# Altium PCB PowerTestManual.PcbDoc
Units mm, origin at the board's own origin, x right, y up, seen from the top; angles counter-clockwise.
Board outline 40 x 28 mm, 2 copper layers (Top Layer, Bottom Layer); 24 components, 17 nets, 54 pads, 0 vias.
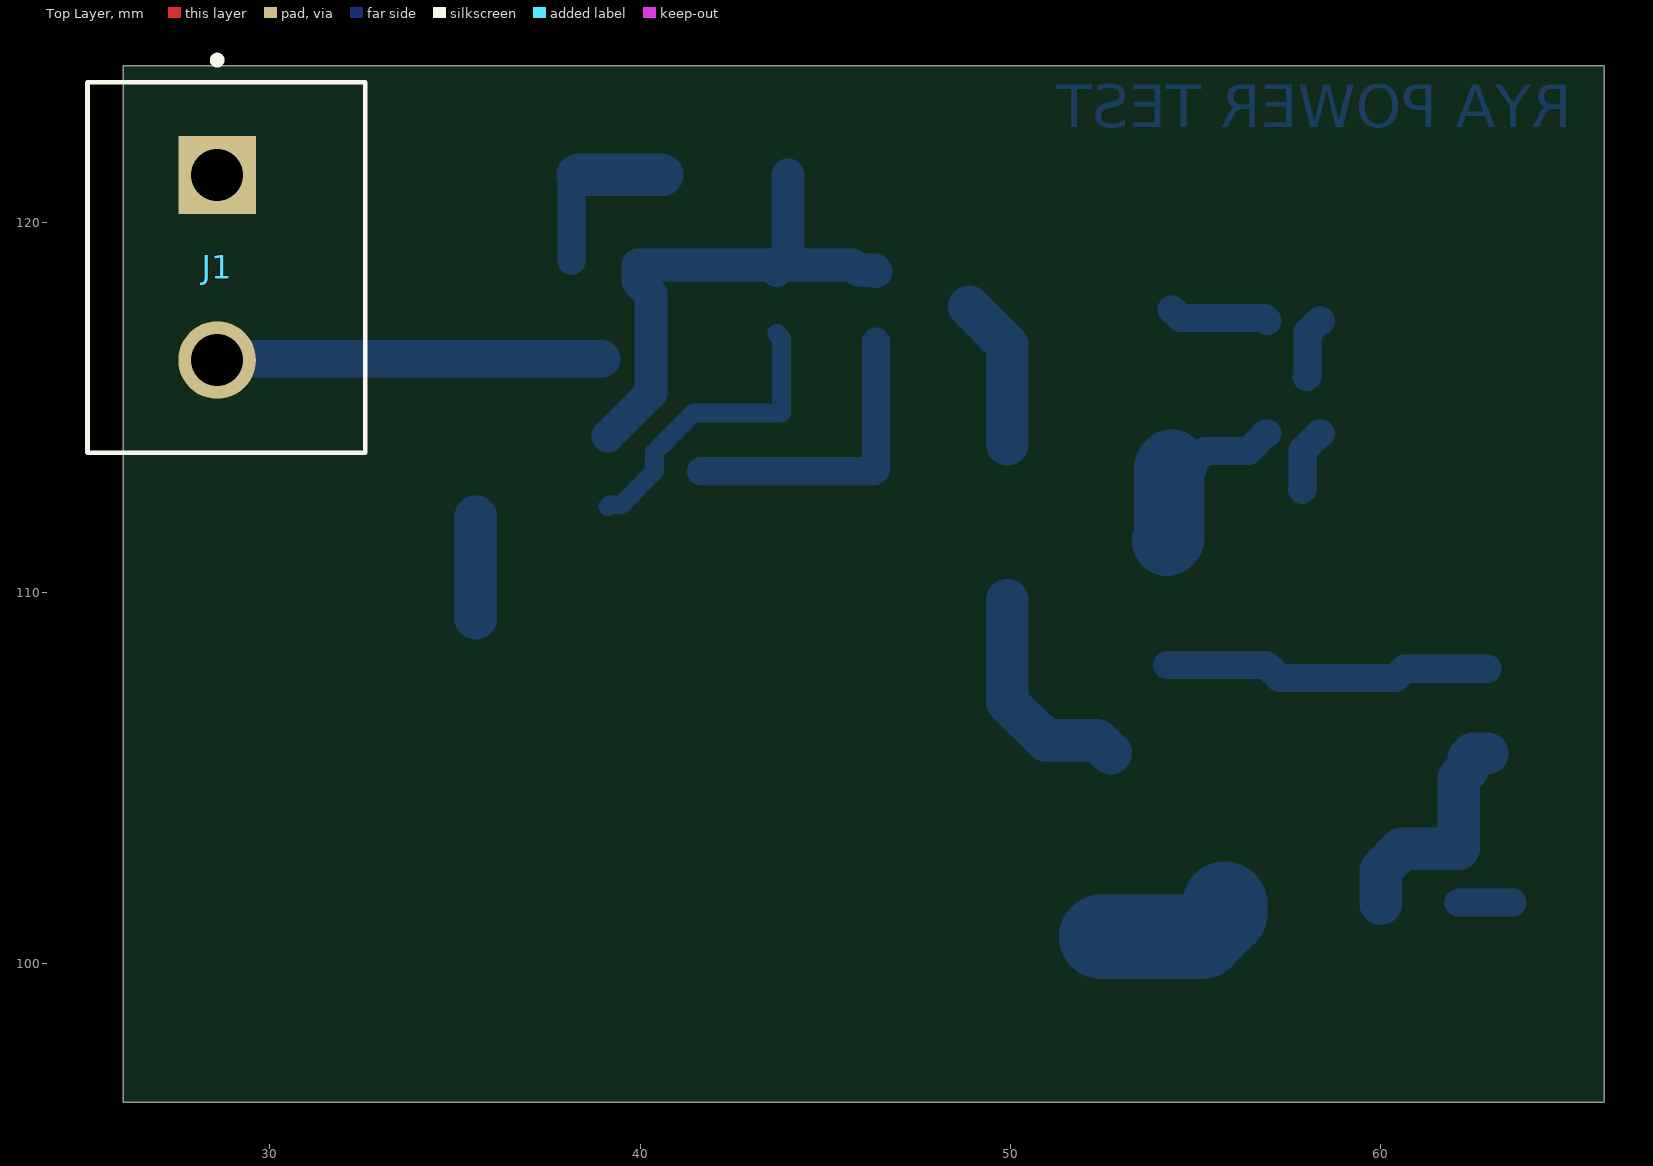
[diagram p0: Top Layer view]
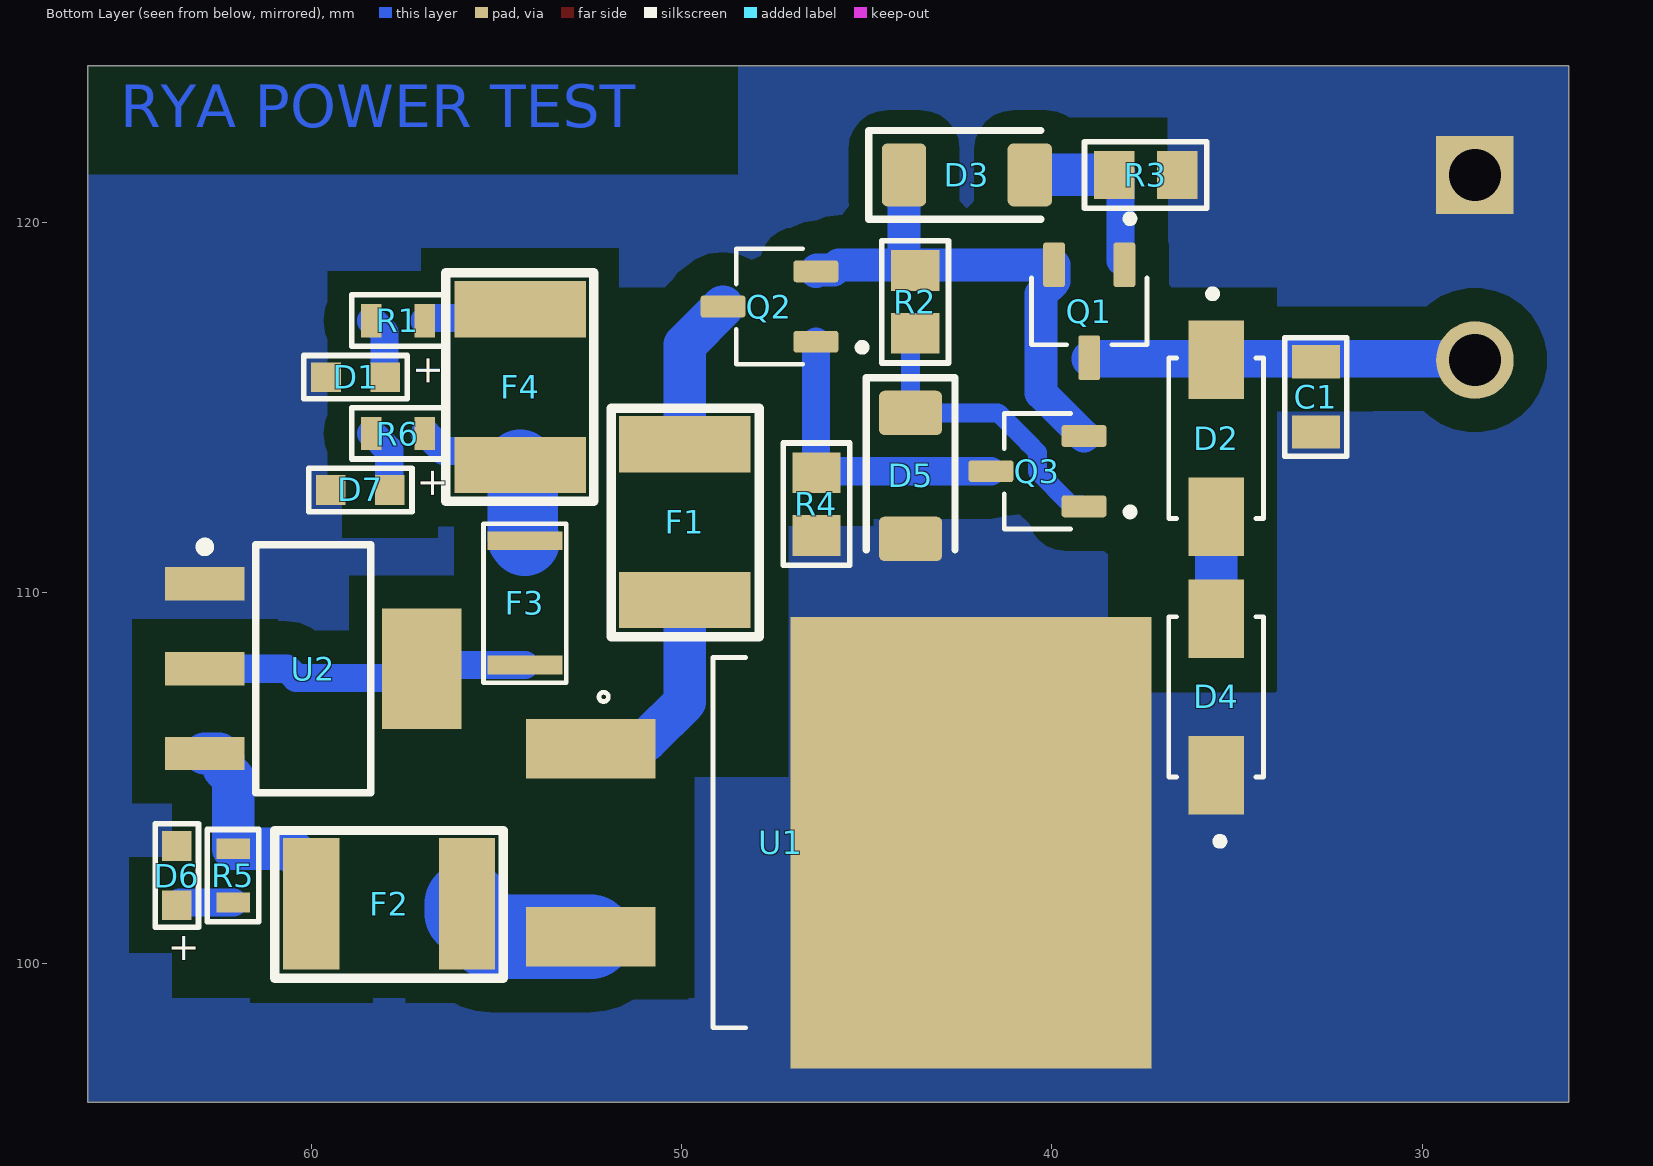
[diagram p1: Bottom Layer view, seen from below]
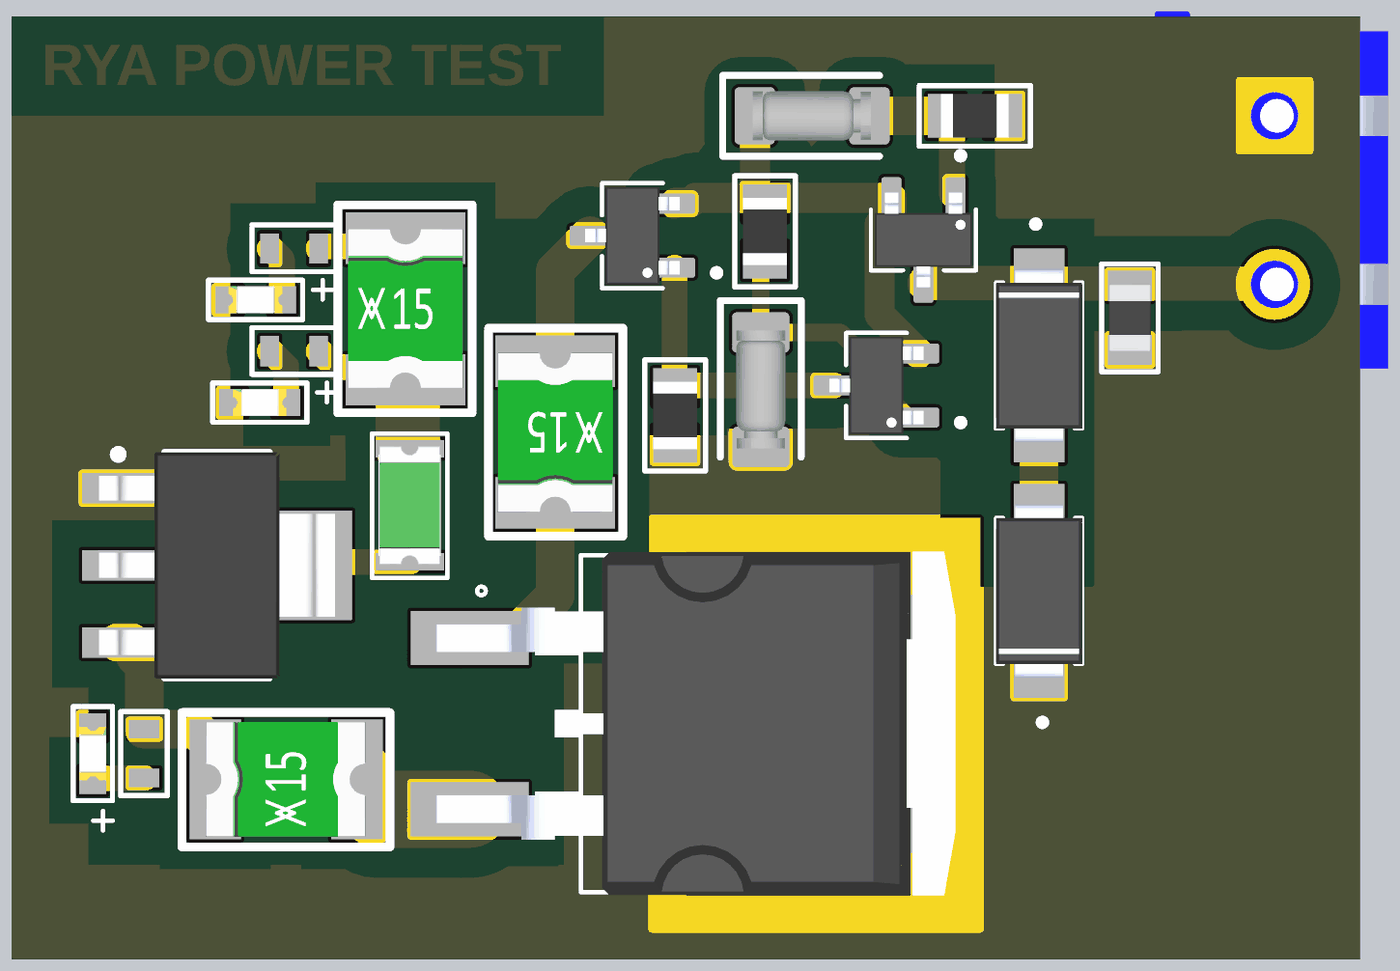
[diagram p2: 3D render of the assembled board from below, using the file's embedded part models]

## Layer stack, top to bottom
Top Solder: solder mask 0.0102, Solder Resist, Dk 3.5
Top Layer: signal copper 0.0356
Dielectric 1: dielectric 0.32, FR-4, Dk 4.8
Bottom Layer: signal copper 0.0356
Bottom Solder: solder mask 0.0102, Solder Resist, Dk 3.5

## Board outline
26.04,96.238 26.04,124.238 66.04,124.238 66.04,96.238

## Design rules (kind name [scope] priority, off if disabled: settings)
Clearance PolygonClearance [InPolygon] p1: gap=0.889 ignorepadtopadclearanceinfootprint=FALSE
Clearance [All] p2: gap=0.254 ignorepadtopadclearanceinfootprint=FALSE
PolygonConnect [All] p1: connectstyle=Direct reliefconductorwidth=0.254 reliefentries=4 polygonreliefangle="90 Angle" airgapwidth=0.254
RoutingVias [All] p1: holewidth=0.711 width=1.27 viastyle="Through Hole" minholewidth=0.711 minwidth=1.27 maxholewidth=0.711 maxwidth=1.27
SolderMaskExpansion [All] p1: expansion=0.102 istentingtop=FALSE
SupplyNets "Schematic Supply Nets" [InNet('GND')] p1: voltage=0.000
Width "Schematic Width Constraint_19" [InNet('NetF1_0')] p1: maxlimit=5.08 minlimit=0.254 preferedwidth=0.381
Width "Schematic Width Constraint_18" [InNet('NetQ2_1')] p2: maxlimit=5.08 minlimit=0.254 preferedwidth=0.381
Width "Schematic Width Constraint_17" [InNet('NetD5_K')] p3: maxlimit=5.08 minlimit=0.254 preferedwidth=0.381
Width "Schematic Width Constraint_16" [InNet('NetF3_1')] p4: maxlimit=2.54 minlimit=0.254 preferedwidth=0.254
Width "Schematic Width Constraint_15" [InNet('GND')] p5: maxlimit=12.7 minlimit=0.254 preferedwidth=0.381
Width "Schematic Width Constraint_14" [InNet('NetD2_A')] p6: maxlimit=12.7 minlimit=0.254 preferedwidth=0.381
Width "Schematic Width Constraint_13" [InNet('NetC1_2')] p7: maxlimit=12.7 minlimit=0.254 preferedwidth=0.381
Width "Schematic Width Constraint_12" [InNet('GND')] p8: maxlimit=5.08 minlimit=0.254 preferedwidth=0.381
Width "Schematic Width Constraint_11" [InNet('NetD3_A')] p9: maxlimit=5.08 minlimit=0.254 preferedwidth=0.381
Width "Schematic Width Constraint_9" [InNet('NetF2_1')] p10: maxlimit=5.08 minlimit=0.254 preferedwidth=0.381
Width "Schematic Width Constraint_8" [InNet('NetF2_0')] p11: maxlimit=5.08 minlimit=0.254 preferedwidth=0.381
Width "Schematic Width Constraint_7" [InNet('NetF1_1')] p12: maxlimit=5.08 minlimit=0.254 preferedwidth=0.381
Width "Schematic Width Constraint_6" [InNet('NetD3_K')] p13: maxlimit=5.08 minlimit=0.254 preferedwidth=0.381
Width "Schematic Width Constraint_5" [InNet('NetC1_2')] p14: maxlimit=5.08 minlimit=0.254 preferedwidth=0.381
Width "Schematic Width Constraint_4" [InNet('GND')] p15: maxlimit=2.54 minlimit=0.254 preferedwidth=0.254
Width "Schematic Width Constraint_3" [InNet('NetF4_1')] p16: maxlimit=2.54 minlimit=0.254 preferedwidth=0.254
Width "Schematic Width Constraint_2" [InNet('NetF2_1')] p17: maxlimit=2.54 minlimit=0.254 preferedwidth=0.254
Width "Schematic Width Constraint" [InNet('NetF3_0')] p18: maxlimit=2.54 minlimit=0.254 preferedwidth=0.254
Width [All] p19: maxlimit=2.54 minlimit=0.254 preferedwidth=0.254
30 further rules are at their usual default settings.

## Classes and differential pairs
net class POWER: GND NetC1_2 NetD2_A NetD3_A NetD3_K NetD5_K NetF1_0 NetF1_1 NetF2_0 NetF2_1 NetF3_0 NetF3_1 NetF4_1 NetQ2_1
component class U_Power: C1 D2 D3 D4 D5 F1 F2 F3 F4 J1 Q1 Q2 Q3 R2 R3 R4 U1 U2
component class U_MainMCU: D1 R1
component class U_Header: D6 D7 R5 R6

## Components (designator, comment, footprint, x,y, rotation, side; value= is the part's Value field where it differs from the comment)
C1 "0108051041050" CAP_0805 32.893,115.316 r90 bottom value=100nF
D1 "160603RedClear" WL-SMCW_0603_H=0.7mm 58.801,115.824 r180 bottom value="Red, 2V"
D2 "SMAJ18A" DIOM4325X250N 35.56,114.173 r270 bottom
D3 "ZMM18" SOD-80_MiniMELF_Glass 42.291,121.285 r180 bottom value=Shottky-Diode
D4 "SMAJ18A" DIOM4325X250N 35.56,107.188 r90 bottom
D5 "ZMM18" SOD-80_MiniMELF_Glass 43.815,113.157 r270 bottom value=Shottky-Diode
D6 "160603RedClear" WL-SMCW_0603_H=0.7mm 63.627,102.362 r270 bottom value="Red, 2V"
D7 "160603RedClear" WL-SMCW_0603_H=0.7mm 58.674,112.776 r180 bottom value="Red, 2V"
F1 "MF-MSMF110/16-2" Fuse_SMD_1812 49.911,111.887 r270 bottom value="16V, 1.1A"
F2 "MF-MSMF050-2" Fuse_SMD_1812 57.912,101.6 r0 bottom value="15V, 0.5A"
F3 "MF-NSMF035-2" Fuse_SMD_1206 54.229,109.728 r90 bottom value="6V, 0.35A"
F4 "MINISMDC020F" Fuse_SMD_1812 54.356,115.57 r90 bottom value="30V, 0.2A"
J1 "KF301-2P" HANDSON_KF301-2P 28.575,118.785 r270 top
Q1 "AO3407A" SOT95P280X125-3N 38.989,117.602 r270 bottom
Q2 "AO3407A" SOT95P280X125-3N 47.625,117.729 r0 bottom
Q3 "AO3407A" SOT95P280X125-3N 40.386,113.284 r0 bottom
R1 "0006031221" resistor_0603 57.658,117.348 r180 bottom value="1.2 KOhm, 1/4 W"
R2 "0008051031" RESISTOR_0805 43.688,117.856 r90 bottom value="10 KOhm, 1/8 W"
R3 "0008051031" RESISTOR_0805 37.465,121.285 r0 bottom value="10 KOhm, 1/8 W"
R4 "0008051031" RESISTOR_0805 46.355,112.395 r90 bottom value="10 KOhm, 1/8 W"
R5 "0006031221" resistor_0603 62.103,102.362 r90 bottom value="1.2 KOhm, 1/4 W"
R6 "0006031221" resistor_0603 57.658,114.3 r180 bottom value="1.2 KOhm, 1/4 W"
U1 "L7805ACD2T_TO-263" TO-263 45.751,103.251 r180 bottom value="5V, 1.5A"
U2 "AMS1117-3.3V" "AMS1117-3.3V SOT223" 59.944,107.95 r180 bottom value="3.3V, 1A"

## Footprints (in the part's own frame and the unit in brackets; to place one, negate y for a bottom-side part, rotate by r counter-clockwise, add the part's x,y. Pads: shape width x height; smd on the part's side, far side on the other; paste and mask are expansions set on the pad)
"AMS1117-3.3V SOT223" [mm] "SOT223, 4-Leads, Body 6.51x7.00mm, Pitch 2.29mm"
  rect 2.15x0.9 smd: 1(-2.93,2.29) 2(-2.93,0) 3(-2.93,-2.29)
  rect 2.15x3.25 smd: 4(2.93,0)
  silkscreen extent -3.06,-3.35 1.55,3.41, body extent -3.5,-3.35 3.5,3.35, height 1.8
CAP_0805 [mm]
  rect 0.9x1.3 smd: 1(-0.975,-0.025) 2(0.925,-0.025)
  silkscreen extent -1.63,-0.86 1.57,0.81, body extent -1.03,-0.65 0.97,0.6, height 0.6
DIOM4325X250N [mm]
  rect 2.12x1.5 smd: A(2.115,0) C(-2.115,0)
  silkscreen extent -4,-1.28 2.16,1.28, body extent -2.57,-1.28 2.57,1.28, height 2.5
Fuse_SMD_1206 [mil] "Fuse SMD, size 1206"
  rect 20x80 smd: 0(-66,0) 1(66,0)
  silkscreen extent -85,-44 84,44, body extent -69,-36 69,36, height 20
Fuse_SMD_1812 [mil] "Fuse SMD, size 1812"
  rect 60x140 smd: 0(-83.41,0) 1(82,0)
  silkscreen extent -122,-78 121,79, body extent -93,-67 93,67, height 18
HANDSON_KF301-2P [mm]
  rect 2.1x2.1 hole 1.4: 1(-2.5,0)
  round 2.1 hole 1.4: 2(2.5,0)
  silkscreen extent -5.7,-3.5 5,4, body extent -5.6,-3.37 5,4.13, height 10.13
resistor_0603 [mm]
  rect 0.55x0.9 smd: 1(-0.725,0) 2(0.725,0)
  silkscreen extent -1.25,-0.69 1.24,0.7, body extent -0.8,-0.45 0.8,0.45, height 0.5
RESISTOR_0805 [mm] "Chip Resistor, 2-Leads, Body 2,00x1,20mm, IPC Medium Density"
  rect 1.1x1.3 smd: 1(-0.85,0) 2(0.85,0)
  silkscreen extent -1.65,-0.9 1.65,0.9, body extent -1,-0.65 1,0.65, height 0.45
SOD-80_MiniMELF_Glass [mm]
  rrect25% 1.2x1.7 smd: A(1.7,0) K(-1.7,0)
  silkscreen extent -2.65,-1.2 2,1.2, body extent -1.76,-0.72 1.74,0.72, height 1.45
SOT95P280X125-3N [mm]
  rrect25% 1.21x0.59 smd: 1(-1.255,0.95) 2(-1.255,-0.95) 3(1.255,0)
  silkscreen extent -2.6,-1.56 0.9,1.56, body extent -1.4,-1.45 1.4,1.45, height 1.25
TO-263 [mm] "D2PAK"
  rect 3.5x1.6 smd: 1(-6.7,2.54) 2(-6.7,-2.54)
  rect 9.75x12.2 smd paste-7: 3(3.575,0)
  silkscreen extent -6.48,-5 -2.51,5, body extent -7.71,-5.1 7.71,5.1, height 4.6
WL-SMCW_0603_H=0.7mm [mm] "SMD Mono-color Chip LED, body 1.6x0.8mm"
  rect 0.8x0.8 smd: 1(-0.8,0) 2(0.8,0)
  silkscreen extent -1.4,-0.58 1.4,0.58, body extent -0.8,-0.4 0.8,0.4, height 0.7

## Part data
C1: library part CMP-001-00259-1, "CAP, size 0805, 0.1 nF, 50 VDC", Manufacture Name=TDK, Manufacture SN=CGA4J2X8R1H104K125AD, Operating Temperature="-55 to +125degC", Tolerance=10%, Voltage Rating DC="50 VDC", Component Type=Standard, Design Item ID=0108051041050, Mounting Technology=SMT, Packaging="Tape and Reel", Pins=2, Size=0805, Source=Capacitor_0805_10_percent.SchLib, Supplier 1 Name=Mouser, Supplier 1 SN=810-C2012X8R1H104KEP, Supplier 1 URL=https://www.mouser.vn/ProductDetail/TDK/CGA4J2X8R1H104K125AD?qs=LcTL%2F5vFEzExqZqv3rh1qQ%3D%3D&utm_source=mouser-refine-download&utm_medium=file&utm_campaign=CGA4J2X8R1H104K125AD&utm_content=TDK, Supplier 2 Name=Digi-Key, Supplier 2 SN=445-8810-2-ND, Supplier 2 URL=https://www.digikey.com/en/products/detail/tdk-corporation/cga4j2x8r1h104k125ad/3248169, Supplier 3 Name=thegioiic, Supplier 3 SN=OEM, Supplier 3 URL=N/A
D1 D6 D7: library part CMP-004-00094-1, "WL-SMCW SMT Mono-color Chip LED Waterclear, size 0603, Red, 2V, 140deg", Color=Red, Component Type=Standard, ComponentLink1Description="Datasheet link", ComponentLink1URL=N/A, ComponentLink2Description="Supplier 1 URL", ComponentLink2URL=https://www.mouser.vn/ProductDetail/Wurth-Elektronik/150060RS75000?qs=LlUlMxKIyB3QnmZ3fw%2FVCA%3D%3D, ComponentLink3Description="Supplier 2 URL", ComponentLink3URL=https://www.digikey.com/en/products/detail/liteon/LTST-C191KRKT/386837, ComponentLink4Description="Supplier 3 URL", ComponentLink4URL=https://www.thegioiic.com/led-do-0603-dan-smd-trong-suot, Design Item ID=160603RedClear, Pins=2, Size=0603, Source=WL-SMCW_0603.SchLib, Supplier 1 Name=Mouser, Supplier 1 SN=710-150060RS75000, Supplier 1 URL=https://www.mouser.vn/ProductDetail/Wurth-Elektronik/150060RS75000?qs=LlUlMxKIyB3QnmZ3fw%2FVCA%3D%3D, Supplier 2 Name=Digi-Key, Supplier 2 SN=160-1447-2-ND, Supplier 2 URL=https://www.digikey.com/en/products/detail/liteon/LTST-C191KRKT/386837, Supplier 3 Name=ICDayRoi, Supplier 3 SN=N/A, Supplier 3 URL=https://www.thegioiic.com/led-do-0603-dan-smd-trong-suot, Type=Clear
D2 D4: library part CMP-004-00085-1, "400W, 21.1V, 5%, Unidirectional, TVS", Case/Package="SMA-2 Taiwan Semiconductor", Check_prices=https://www.snapeda.com/parts/SMAJ18A/taiwan/view-part/?ref=eda, Component Type=Standard, Design Item ID=SMAJ18A, MF="Taiwan Semiconductor", MP=SMAJ18A, Pins=2, SnapEDA_Link=https://www.snapeda.com/parts/SMAJ18A/taiwan/view-part/?ref=snap, Source=SMAJ18A.SchLib
D3 D5: library part CMP-004-00086-2, Component Type=Standard, Datasheet=https://diotec.com/de/produktliste/SBD.html, Design Item ID=Schottky-Diode, ki_description="Schottky Diode", ki_keywords=Schottky, Pins=2, Reference=D, Source=schottky-diode.SchLib
F1: library part CMP-005-00054-1, "Resettable Fuse, Size 1812, 16V, 1.1A", Hold Current=1.1A, Manufacturer=Bourns, Threshold Current=100A, Threshold Voltage=16V, Trip Current=2.2A, Component Type=Standard, ComponentLink1Description="Datasheet link", ComponentLink1URL=https://www.bourns.com/docs/Product-Datasheets/mfnsmf.pdf, ComponentLink2Description="Supplier 1 URL", ComponentLink2URL=https://www.mouser.vn/ProductDetail/Bourns/MF-MSMF110-16-2?qs=wksszfECgvir54ST3ixUHA%3D%3D, ComponentLink3Description="Supplier 2 URL", ComponentLink3URL=https://www.digikey.com/en/products/detail/bourns-inc/MF-MSMF110-16-2/662820, ComponentLink4Description="Supplier 3 URL", ComponentLink4URL=https://www.thegioiic.com/mf-msmf110-16-2-cau-chi-tu-phuc-hoi-1812-16v-1-1a, Design Item ID=061812110016, Mounting Technology=SMT/SMD, Pins=2, Size=1812, Source=Fuse_SMD.SchLib, Supplier 1 Name=Mouser, Supplier 1 SN=652-MF-MSMF110/16-2, Supplier 1 URL=https://www.mouser.vn/ProductDetail/Bourns/MF-MSMF110-16-2?qs=wksszfECgvir54ST3ixUHA%3D%3D, Supplier 2 Name=Digi-Key, Supplier 2 SN=MF-MSMF110/16-2TR-ND, Supplier 2 URL=https://www.mouser.vn/ProductDetail/Bourns/MF-MSMF110-16-2?qs=wksszfECgvir54ST3ixUHA%3D%3D, Supplier 3 Name=thegioiic, Supplier 3 SN=MF-MSMF110/16-2, Supplier 3 URL=https://www.thegioiic.com/mf-msmf110-16-2-cau-chi-tu-phuc-hoi-1812-16v-1-1a
F2: library part CMP-005-00051-1, "Resettable Fuse, Size 1812, 15V, 0.5A", Hold Current=0.5A, Manufacturer=Bourns, Threshold Current=100A, Threshold Voltage=15V, Trip Current=1A, Component Type=Standard, ComponentLink1Description="Datasheet link", ComponentLink1URL=https://www.bourns.com/docs/Product-Datasheets/mfnsmf.pdf, ComponentLink2Description="Supplier 1 URL", ComponentLink2URL=https://www.mouser.vn/ProductDetail/Bourns/MF-MSMF050-2?qs=t3shhpq1i1DZ7OBD5kLNoA%3D%3D, ComponentLink3Description="Supplier 2 URL", ComponentLink3URL=https://www.digikey.com/en/products/detail/bourns-inc/MF-MSMF050-2/662816?s=N4IgTCBcDaILIDEC0cDKiAMBWDSIF0BfIA, ComponentLink4Description="Supplier 3 URL", ComponentLink4URL=https://www.thegioiic.com/mf-msmf050-2-cau-chi-tu-phuc-hoi-1812-15v-0-5a, Design Item ID=061812050015, Mounting Technology=SMT/SMD, Pins=2, Size=1812, Source=Fuse_SMD.SchLib, Supplier 1 Name=Mouser, Supplier 1 SN=652-MF-MSMF050-2, Supplier 1 URL=https://www.mouser.vn/ProductDetail/Bourns/MF-MSMF050-2?qs=t3shhpq1i1DZ7OBD5kLNoA%3D%3D, Supplier 2 Name=Digi-Key, Supplier 2 SN=MF-MSMF050-2TR-ND, Supplier 2 URL=https://www.mouser.vn/ProductDetail/Bourns/MF-MSMF050-2?qs=t3shhpq1i1DZ7OBD5kLNoA%3D%3D, Supplier 3 Name=thegioiic, Supplier 3 SN=MF-MSMF050-2, Supplier 3 URL=https://www.thegioiic.com/mf-msmf050-2-cau-chi-tu-phuc-hoi-1812-15v-0-5a
F3: library part CMP-005-00048-1, "Resettable Fuse, Size 1206, 6V, 0.35A", Hold Current=0.35A, Manufacturer=Bourns, Threshold Current=100A, Threshold Voltage=6V, Trip Current=0.75A, Component Type=Standard, ComponentLink1Description="Datasheet link", ComponentLink1URL=https://www.bourns.com/docs/Product-Datasheets/mfnsmf.pdf, ComponentLink2Description="Supplier 1 URL", ComponentLink2URL=https://www.mouser.vn/ProductDetail/Bourns/MF-NSMF035-2?qs=3eVyCPG4fwnHDrvs%2FGppSw%3D%3D, ComponentLink3Description="Supplier 2 URL", ComponentLink3URL=https://www.digikey.com/en/products/detail/bourns-inc/MF-NSMF035-2/1232784?s=N4IgTCBcDaILIDEC0A5AyogDAZgKxIgF0BfIA, ComponentLink4Description="Supplier 3 URL", ComponentLink4URL=https://www.thegioiic.com/mf-nsmf035-2-cau-chi-tu-phuc-hoi-1206-6v-0-35a, Design Item ID=061206035006, Mounting Technology=SMT/SMD, Pins=2, Size=1206, Source=Fuse_SMD.SchLib, Supplier 1 Name=Mouser, Supplier 1 SN=652-MF-NSMF035-2, Supplier 1 URL=https://www.mouser.vn/ProductDetail/Bourns/MF-NSMF035-2?qs=3eVyCPG4fwnHDrvs%2FGppSw%3D%3D, Supplier 2 Name=Digi-Key, Supplier 2 SN=MF-NSMF035-2TR-ND, Supplier 2 URL=https://www.mouser.vn/ProductDetail/Bourns/MF-NSMF035-2?qs=3eVyCPG4fwnHDrvs%2FGppSw%3D%3D, Supplier 3 Name=thegioiic, Supplier 3 SN=MF-NSMF035-2, Supplier 3 URL=https://www.thegioiic.com/mf-nsmf035-2-cau-chi-tu-phuc-hoi-1206-6v-0-35a
F4: library part CMP-005-00050-1, "Resettable Fuse, Size 1812, 30V, 0.2A", Hold Current=0.2A, Manufacturer=Bourns, Threshold Current=80A, Threshold Voltage=30V, Trip Current=0.4A, Component Type=Standard, ComponentLink1Description="Datasheet link", ComponentLink1URL=https://www.bourns.com/docs/Product-Datasheets/mfnsmf.pdf, ComponentLink2Description="Supplier 1 URL", ComponentLink2URL=https://www.mouser.vn/ProductDetail/Bourns/MF-MSMF020-2?qs=YYkh393lUtjbPn24kFIUNQ%3D%3D, ComponentLink3Description="Supplier 2 URL", ComponentLink3URL=https://www.digikey.com/en/products/detail/bourns-inc/MF-MSMF020-2/662814?s=N4IgTCBcDaILIDEC0cDKiAMYNLAAhAF0BfIA, ComponentLink4Description="Supplier 3 URL", ComponentLink4URL=https://www.thegioiic.com/mf-msmf020-2-cau-chi-tu-phuc-hoi-1812-0-20a-30v, Design Item ID=061812020030, Mounting Technology=SMT/SMD, Pins=2, Size=1812, Source=Fuse_SMD.SchLib, Supplier 1 Name=Mouser, Supplier 1 SN=652-MF-MSMF020-2, Supplier 1 URL=https://www.mouser.vn/ProductDetail/Bourns/MF-MSMF020-2?qs=YYkh393lUtjbPn24kFIUNQ%3D%3D, Supplier 2 Name=Digi-Key, Supplier 2 SN=MF-MSMF020-2TR-ND, Supplier 2 URL=https://www.mouser.vn/ProductDetail/Bourns/MF-MSMF020-2?qs=YYkh393lUtjbPn24kFIUNQ%3D%3D, Supplier 3 Name=thegioiic, Supplier 3 SN=MF-MSMF020-2, Supplier 3 URL=https://www.thegioiic.com/mf-msmf020-2-cau-chi-tu-phuc-hoi-1812-0-20a-30v
J1: library part CMP-118-000001-1, "2 Pin Terminal Block 5mm Pitch", Package=None, Availability=Unavailable, Design Item ID=KF301-2P, MP=KF301-2P, Price=None, Source=KF301-2P.SchLib
Q1 Q2 Q3: library part CMP-123-000000-1, "P-Channel 30 V 4.3A (Ta) 1.4W (Ta) Surface Mount SOT-23-3", Package="SOT-23 Alpha &amp; Omega Semiconductor", Check_prices=https://www.snapeda.com/parts/AO3407A/Alpha/view-part/?ref=eda, Component Type=Standard, Design Item ID=AO3407A, MF="Alpha &", MP=AO3407A, Pin Count=3, SnapEDA_Link=https://www.snapeda.com/parts/AO3407A/Alpha/view-part/?ref=snap, Source=AO3407A.SchLib
R1 R5 R6: library part CMP-009-00209-1, "RES, size 0603, 1.2 KOhm, 1/4 W", Manufacture  Name=OEM, Rated Power="1/4 W", Resistance Tolerance=+/-1%, Component Type=Standard, ComponentLink1Description="Datasheet link", ComponentLink1URL=https://api.pim.na.industrial.panasonic.com/file_stream/main/fileversion/4484, ComponentLink2Description="Supplier 1 URL", ComponentLink2URL=N/A, ComponentLink3Description="Supplier 2 URL", ComponentLink3URL=N/A, ComponentLink4Description="Supplier 3 URL", ComponentLink4URL=N/A, Design Item ID=0006031221, Manufacture  SN=OEM, Mounting Technology=SMT, Pins=2, Size=0603, Source=Resistor_0603.SchLib, Supplier 1 Name=Mouser, Supplier 1 SN=667-ERJ-UP3F1201V, Supplier 1 URL=https://www.mouser.vn/ProductDetail/Panasonic/ERJ-UP3F1201V?qs=sGAEpiMZZMvdGkrng054twq3eZrCFN895BO3G72d%2F02jECAea43bgQ%3D%3D, Supplier 2 Name=Digi-Key, Supplier 2 SN="10-ERJ-UP3F1201VTR-ND 10-ERJ-UP3F1201VCT-ND 10-ERJ-UP3F1201VDKR-ND", Supplier 2 URL=N/A, Supplier 3 Name=thegioiic, Supplier 3 SN=N/A, Supplier 3 URL=N/A
R2 R3 R4: library part CMP-009-00482-1, "RES, size 0805, 10 KOhm, 1/8 W", Manufacture  Name="Vishay Dale", Manufacture  SN=CRCW080515K0FKEAC, Rated Power="1/8 W", Resistance Tolerance=+/-1%, Component Type=Standard, ComponentLink1Description="Datasheet link", ComponentLink1URL=https://www.vishay.com/docs/28773/crcwce3.pdf, ComponentLink2Description="Supplier 1 URL", ComponentLink2URL=https://www.mouser.vn/ProductDetail/Vishay-Dale/CRCW080515K0FKEA?qs=bMjB6bAaLEM4rXT2DoR3BA%3D%3D, ComponentLink3Description="Supplier 2 URL", ComponentLink3URL=https://www.digikey.com/en/products/detail/vishay-dale/CRCW080515K0FKEAC/7928558, ComponentLink4Description="Supplier 3 URL", ComponentLink4URL=N/A, Design Item ID=0008051531, Mounting Technology=SMT, Pins=2, Size=0805, Source=Resistor_0805.SchLib, Supplier 1 Name=Mouser, Supplier 1 SN=71-CRCW0805-15K-E3, Supplier 1 URL=https://www.mouser.vn/ProductDetail/Vishay-Dale/CRCW080515K0FKEA?qs=bMjB6bAaLEM4rXT2DoR3BA%3D%3D, Supplier 2 Name=Digi-Key, Supplier 2 SN=541-4136-2-ND, Supplier 2 URL=https://www.digikey.com/en/products/detail/vishay-dale/CRCW080515K0FKEAC/7928558, Supplier 3 Name=Thegioiic, Supplier 3 SN=N/A, Supplier 3 URL=N/A
U1: library part CMP-098-000007-1, "Out: 5V, 1.5A; In: 7V to 35V; Pacakge: TO-263", Output Current=1.5A, Package=TO-263, Voltage Input Maximum="7V to 35V", Voltage Output=5V, Component Type=Standard, ComponentLink1Description="Datasheet link", ComponentLink1URL=https://www.st.com/resource/en/datasheet/l78.pdf, ComponentLink2Description="Supplier 1 URL", ComponentLink2URL=https://www.mouser.com/ProductDetail/STMicroelectronics/L7805ACD2T-TR?qs=Ctxo64yJVFuOLXlPPZdJUQ%3D%3D, ComponentLink3Description="Supplier 2 URL", ComponentLink3URL=https://www.digikey.com/en/products/detail/stmicroelectronics/L7805ACD2T-TR/1038230, ComponentLink4Description="Supplier 3 URL", ComponentLink4URL=https://www.thegioiic.com/l7805acd2t-ic-on-ap-5v-1-5a, Design Item ID=L7805ACD2T_TO-263, Pin Count=3, Source=78xx.SchLib, Supplier 1 Name=Mouser, Supplier 1 SN=511-L7805ACD2T-TR, Supplier 1 URL=https://www.mouser.com/ProductDetail/STMicroelectronics/L7805ACD2T-TR?qs=Ctxo64yJVFuOLXlPPZdJUQ%3D%3D, Supplier 2 Name=Digi-Key, Supplier 2 SN=497-7253-2-ND, Supplier 2 URL=https://www.digikey.com/en/products/detail/stmicroelectronics/L7805ACD2T-TR/1038230, Supplier 3 Name=thegioiic, Supplier 3 SN=N/A, Supplier 3 URL=https://www.thegioiic.com/l7805acd2t-ic-on-ap-5v-1-5a
U2: library part CMP-098-000004-1, "AMS1117-3.3V, OUT 3.3V 1A.", Current Input Maximum=N/A, Current Output Maximum=1A, Manufacturer=AMS, Voltage Input Maximum=15V, Voltage Output=3.3V, Component Type=Standard, ComponentLink1Description="Datasheet link", ComponentLink1URL=http://www.advanced-monolithic.com/pdf/ds1117.pdf, ComponentLink2Description="Supplier 1 URL", ComponentLink2URL=N/A, ComponentLink3Description="Supplier 2 URL", ComponentLink3URL=N/A, ComponentLink4Description="Supplier 3 URL", ComponentLink4URL=N/A, Design Item ID=AMS1117-3.3V, Manufacturer Part Number=N/A, Mounting Technology=SMD, Pad Count=4, Pin Count=4, Source=AMS_family.SchLib, Supplier 1 Name=Mouser, Supplier 1 SN=N/A, Supplier 1 URL=N/A, Supplier 2 Name=Digi-Key, Supplier 2 SN=N/A, Supplier 2 URL=N/A, Supplier 3 Name=thegioiic, Supplier 3 SN=N/A, Supplier 3 URL=https://www.thegioiic.com/ams1117-3-3v-ic-on-ap-3-3v-1a-sot-223

## Nets (pads, with @x,y where several pads share a name; then routed paths per layer and width w, separated by ;. In a path a pad name is that pad's centre, name@x,y a point inside that pad or via, vN(x,y) a via of type N, cw(c..) or ccw(c..) an arc to the next point about the centre after c; other vN are vias at no path point)
GND: C1.1 D1.1 D4.C D5.A D6.1 D7.1 J1.1 R3.1 R4.1 U1.3 U2.1
NetC1_2: C1.2 D2.C J1.2 Q1.3 | length 10.4
  Bottom Layer w0.381: J1.2 J1.2@28.606,116.316 ; Q1.3@38.958,116.316 Q1.3
  Bottom Layer w1.016: J1.2@28.606,116.316 35.56,116.316 35.561,116.317 38.957,116.317 Q1.3@38.958,116.316
NetD1_2: D1.2 R1.1 | length 1.7
  Bottom Layer w0.762: D1.2 58.02,115.843 58.02,117.022 58.346,117.348 R1.1
NetD2_A: D2.A D4.A | length 2.8
  Bottom Layer w1.143: D4.A D2.A
NetD3_A: D3.A Q1.1 R3.2 | length 4.8
  Bottom Layer w0.381: Q1.1 Q1.1@38.144,118.961 ; R3.2@38.144,121.114 R3.2
  Bottom Layer w0.762: Q1.1@38.144,118.961 R3.2@38.144,121.114
  Bottom Layer w1.143: R3.2 D3.A
NetD3_K: D3.K Q1.2 Q2.2 Q3.2 R2.2 | length 14.2
  Bottom Layer w0.889: Q3.2 40.291,115.394 40.291,118.065 39.939,118.417 Q1.2 R2.2@43.688,118.857 ; R2.2 43.991,119.009 D3.K ; R2.2@43.991,118.857 45.752,118.857 45.897,118.713 46.337,118.713 Q2.2
NetD5_K: D5.K Q3.1 R2.1 | length 8.2
  Bottom Layer w0.508: Q3.1 39.172,112.375 39.482,112.375 40.386,113.279 40.386,113.792 40.64,114.046 41.451,114.857 D5.K 43.815,116.879 R2.1
NetD6_2: D6.2 R5.1 | length 1.6
  Bottom Layer w0.254: D6.2@63.552,101.637 D6.2
  Bottom Layer w0.762: R5.1 D6.2@63.552,101.637
NetD7_2: D7.2 R6.1 | length 1.8
  Bottom Layer w0.762: D7.2 57.893,112.795 57.893,113.847 58.346,114.3 R6.1
NetF1_0: F1.0 Q2.3 | length 4.2
  Bottom Layer w1.143: Q2.3 49.911,116.698 F1.0
NetF1_1: F1.1 U1.1 | length 6.1
  Bottom Layer w1.143: F1.1 49.911,107.055 50.947,106.02 52.348,106.02 U1.1@52.704,105.664
NetF2_0: F2.0 U1.2 | length 3.9
  Bottom Layer w2.286: U1.2 55.158,100.711 55.793,101.346 F2.0
NetF2_1: F2.1 R5.2 U2.3 | length 6.4
  Bottom Layer w1.143: F2.1 59.995,102.515 60.566,103.087 R5.2 62.103,104.99 62.37,105.258 62.37,105.539 62.492,105.66 U2.3
NetF3_0: F3.0 U2.2 U2.4 | length 8.9
  Bottom Layer w0.762: F3.0 56.912,108.052 U2.4 57.268,107.696 57.395,107.696 60.402,107.696 60.656,107.95 U2.2
NetF3_1: F3.1 F4.0 R6.2 | length 4.9
  Bottom Layer w0.762: F4.0@54.61,113.197 55.245,113.832 56.428,113.832 56.896,114.3 R6.2
  Bottom Layer w1.905: F3.1 54.292,111.468 54.292,113.388 F4.0
NetF4_1: F4.1 R1.2 | length 2.7
  Bottom Layer w0.762: F4.1 54.592,117.417 56.864,117.417 R1.2
NetQ2_1: Q2.1 Q3.3 R4.2 | length 8.2
  Bottom Layer w0.254: R4.2@46.316,113.284 R4.2@46.37,113.338
  Bottom Layer w0.762: Q3.3 R4.2@46.316,113.284 ; R4.2@46.37,113.338 Q2.1

## Polygon pours and split planes (outlines as drawn)
GND on Bottom Layer "GND_L02_P000" (solid, pour order 0): 26.035,124.206 66.04,124.206 66.04,96.266 26.035,96.266

## Other copper
Bottom Layer:
  pour cut-out: 33.921,107.354 33.921,114.902 38.448,114.902 38.481,114.935 38.481,107.315 33.96,107.315
  pour cut-out: 63.754,106.934 63.754,99.06 49.657,99.06 49.657,106.934
  pour cut-out: 47.117,105.029 47.117,118.237 54.61,118.237 54.61,105.029
  text "RYA POWER TEST" at 65.151,122.198 h1.98

## Silkscreen, mask and mechanical layers (free items; w line width, h text height)
Drill Guide:
  the board outline again, w0.254

## Text inside footprints (layer, text, board x,y; h text height)
D1: Bottom Overlay "+" at 56.515,115.57 h0.76 r270
D6: Bottom Overlay "+" at 63.881,100.076 h0.76
D7: Bottom Overlay "+" at 56.388,112.522 h0.76 r270